# Altium PCB 80361_RevA2-PCB.PcbDoc
Units mm, origin at the board's own origin, x right, y up, seen from the top; angles counter-clockwise.
Board outline 72 x 72 mm, 2 copper layers (Top Layer, Bottom Layer), stack 2.342 mm thick; 1 components, 3 nets, 32 pads, 0 vias.
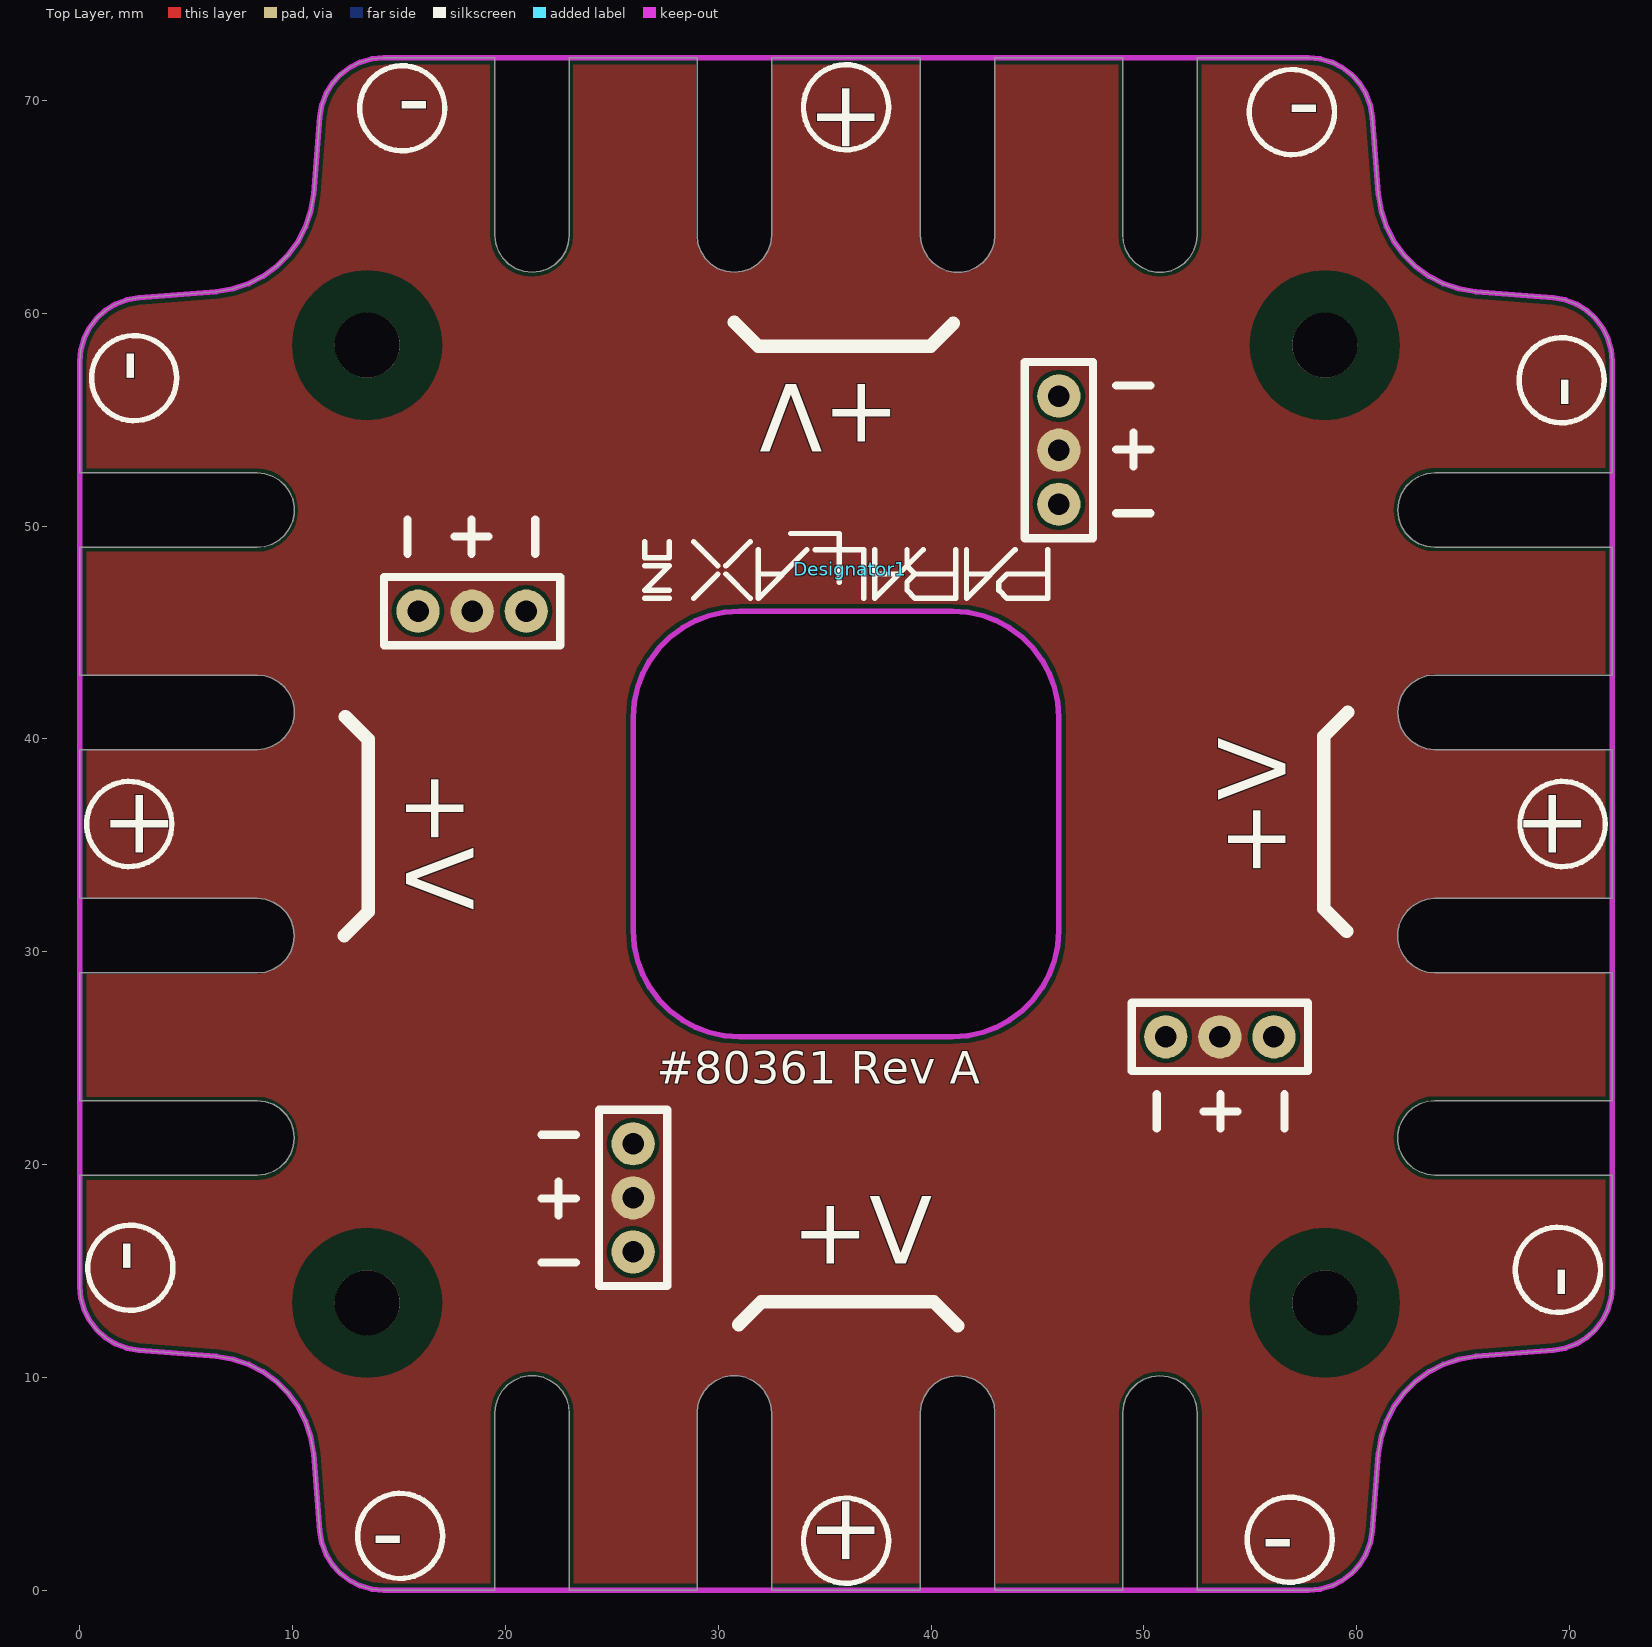
[diagram p0: Top Layer view]
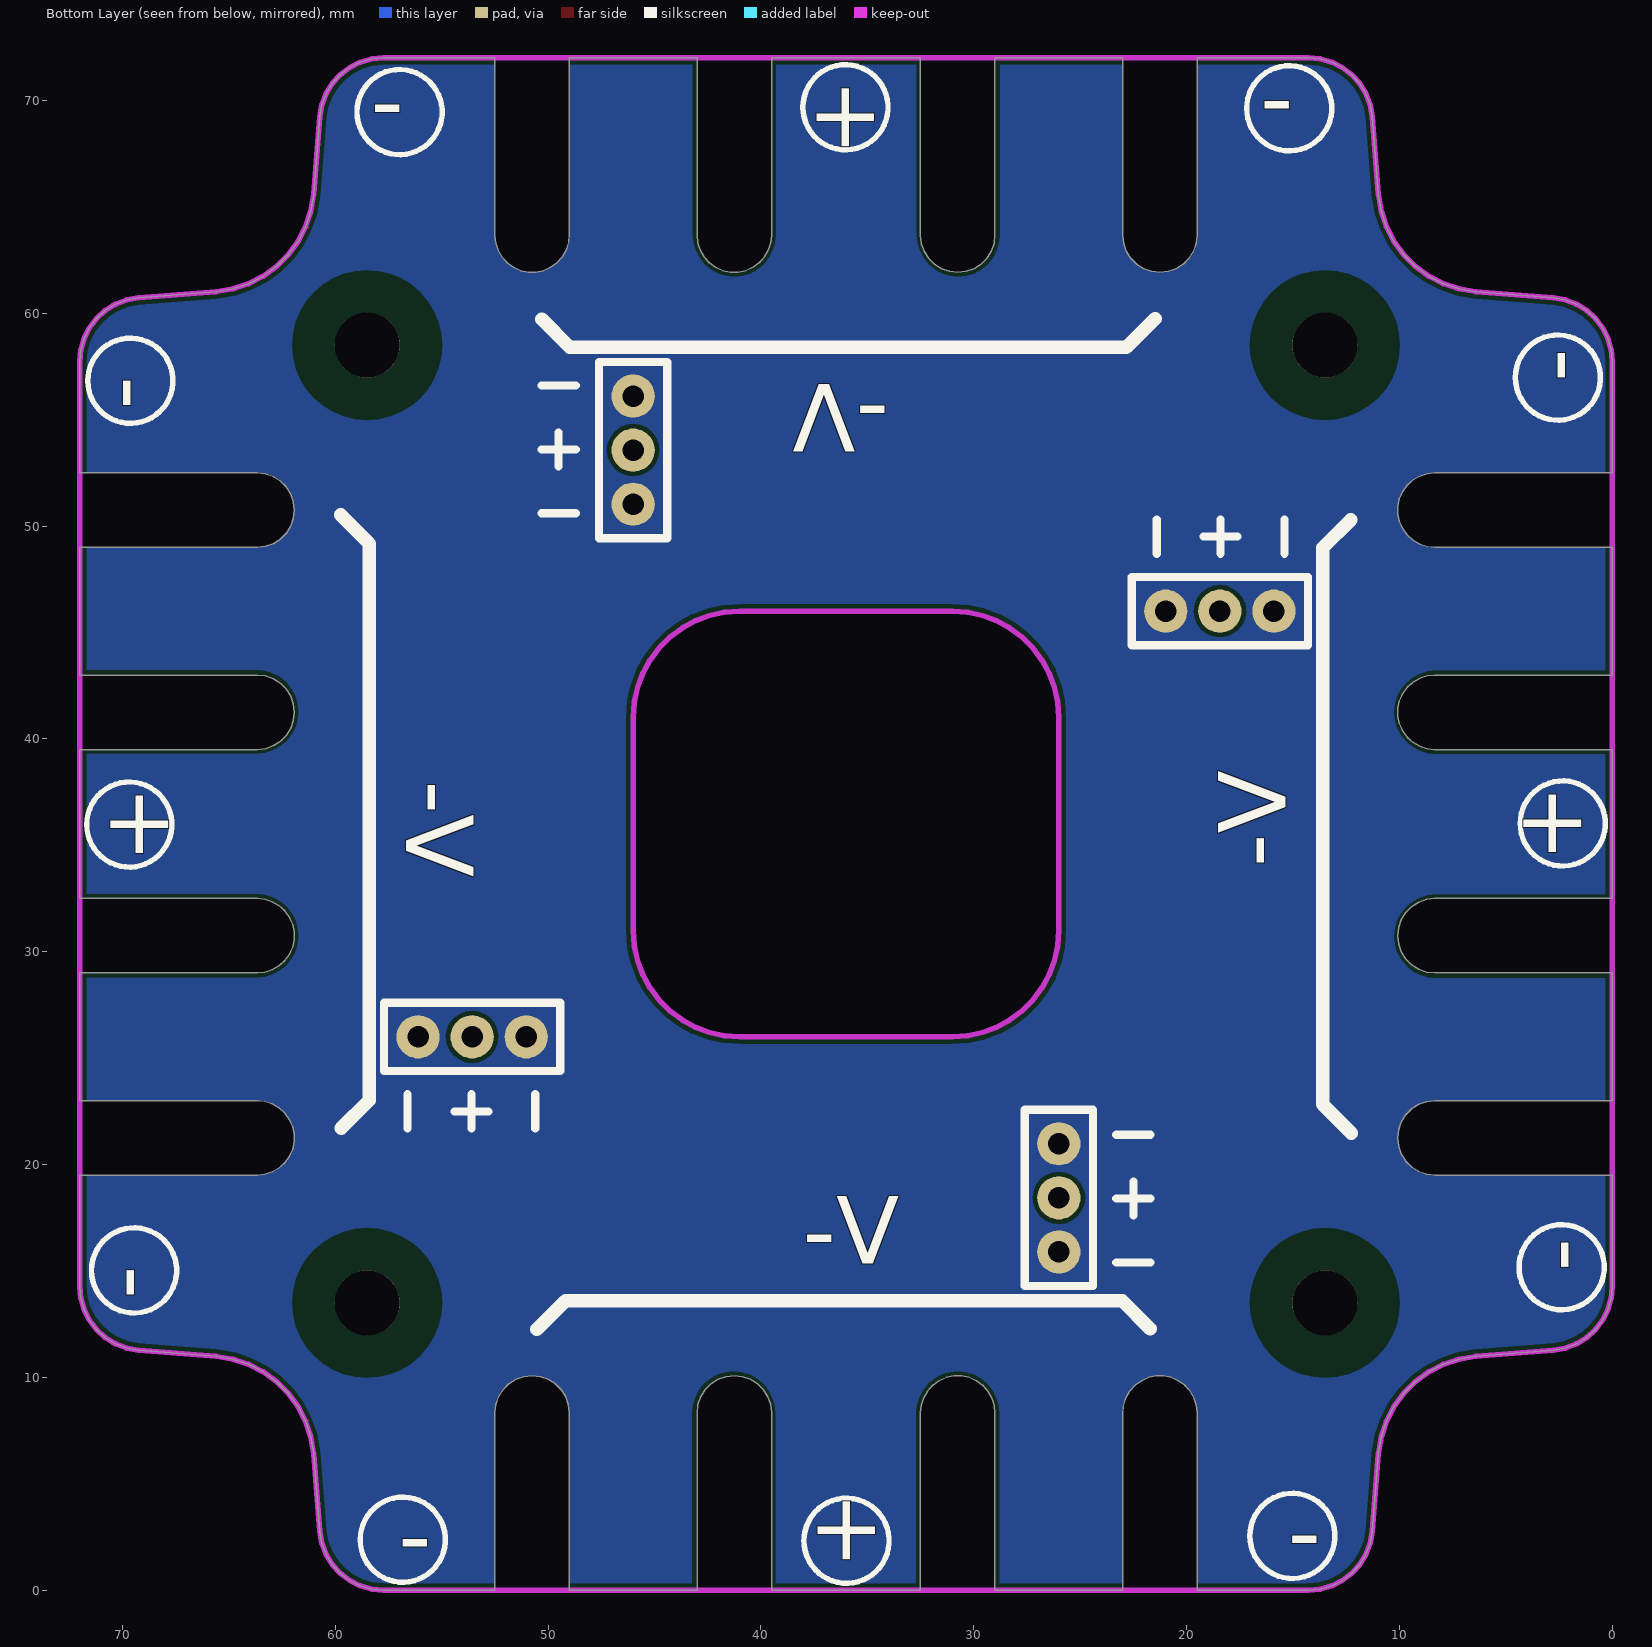
[diagram p1: Bottom Layer view, seen from below]

## Layer stack, top to bottom
Top Solder: solder mask 0.0102, Solder Resist, Dk 3.5
Top Layer: signal copper 0.2845
Dielectric 1: dielectric 1.7729, FR-4, Dk 4.8
Bottom Layer: signal copper 0.2845
Bottom Solder: solder mask 0.0102, Solder Resist, Dk 3.5

## Board outline
401 vertices, not listed, extent 0,0 72,72
cut-out: 26,41 26.051,41.712 26.203,42.409 26.452,43.077 26.794,43.703 27.221,44.274 27.726,44.779 28.297,45.206 28.923,45.548 29.591,45.797 30.288,45.949 31,46 41,46 41.712,45.949 42.409,45.797 43.077,45.548 43.703,45.206 44.274,44.779 44.779,44.274 45.206,43.703 45.548,43.077 45.797,42.409 45.949,41.712 46,41 46,31 45.949,30.288 45.797,29.591 45.548,28.923 45.206,28.297 44.779,27.726 44.274,27.221 43.703,26.794 43.077,26.452 42.409,26.203 41.712,26.051 41,26 31,26 30.288,26.051 29.591,26.203 28.923,26.452 28.297,26.794 27.726,27.221 27.221,27.726 26.794,28.297 26.452,28.923 26.203,29.591 26.051,30.288 26,31

## Design rules (kind name [scope] priority, off if disabled: settings)
Clearance [All] p1: gap=0.203
PlaneClearance [All] p1: clearance=0.889
PolygonConnect [All] p1: connectstyle=Direct reliefconductorwidth=0.254 reliefentries=4 polygonreliefangle="90 Angle" airgapwidth=0.254
RoutingVias [All] p1: holewidth=0.305 width=0.635 viastyle="Through Hole" minholewidth=0.305 minwidth=0.508 maxholewidth=12.7 maxwidth=12.7
SolderMaskExpansion [All] p1: expansion=0.102
Width [All] p1: maxlimit=12.7 minlimit=0.178 preferedwidth=0.254 minimp=50.000000 maximp=50.000000 favimp=50.000000
29 further rules are at their usual default settings.

## Components (designator, comment, footprint, x,y, rotation, side; value= is the part's Value field where it differs from the comment)
Designator1 "Comment" "Parallax Logo_Top" 36.2,48 r180 top

## Footprints (in the part's own frame and the unit in brackets; to place one, negate y for a bottom-side part, rotate by r counter-clockwise, add the part's x,y. Pads: shape width x height; smd on the part's side, far side on the other; paste and mask are expansions set on the pad)
"Parallax Logo_Top" [mm]
  silkscreen extent -9.27,-1.65 9.65,1.4

## Free pads (board coordinates)
  round 1.524 hole 3.5 slot 12 at 0 deg: 1(4.05,21.225) 1(4.05,30.725) 1(4.05,41.25) 1(4.05,50.75) 1(67.925,21.25) 1(67.925,30.75) 1(67.925,41.275) 1(67.925,50.775)
  round 3.048 hole 3.048 unplated: 1(13.5,13.5) 1(13.5,58.5) 1(58.5,13.5) 1(58.5,58.5)
  round 2.032 hole 1.016: 1(15.895,46) 1(18.435,46) 1(20.975,46) 1(26,15.895) 1(26,18.435) 1(26,20.975) 1(46,51.025) 1(46,53.565) 1(46,56.105) 1(51.025,26) 1(53.565,26) 1(56.105,26)
  round 1.524 hole 3.5 slot 12 at 90 deg: 1(21.225,67.925) 1(21.25,4.075) 1(30.725,67.925) 1(30.75,4.075) 1(41.25,67.925) 1(41.275,4.075) 1(50.75,67.925) 1(50.775,4.075)

## Nets (pads, with @x,y where several pads share a name; then routed paths per layer and width w, separated by ;. In a path a pad name is that pad's centre, name@x,y a point inside that pad or via, vN(x,y) a via of type N, cw(c..) or ccw(c..) an arc to the next point about the centre after c; other vN are vias at no path point)
GND: pad.1@4.05,21.225 pad.1@4.05,50.75 pad.1@15.895,46 pad.1@20.975,46 pad.1@21.25,4.075 pad.1@21.225,67.925 pad.1@26,15.895 pad.1@26,20.975 pad.1@46,51.025 pad.1@46,56.105 pad.1@50.75,67.925 pad.1@50.775,4.075 pad.1@51.025,26 pad.1@56.105,26 pad.1@67.925,21.25 pad.1@67.925,50.775
NewNet: 
VIN: pad.1@4.05,30.725 pad.1@4.05,41.25 pad.1@18.435,46 pad.1@26,18.435 pad.1@30.75,4.075 pad.1@30.725,67.925 pad.1@41.25,67.925 pad.1@41.275,4.075 pad.1@46,53.565 pad.1@53.565,26 pad.1@67.925,30.75 pad.1@67.925,41.275

## Polygon pours and split planes (outlines as drawn)
VIN on Top Layer "TOP VIN" (solid, pour order 0): 401 vertices, not listed, extent 0,0 72,72
GND on Bottom Layer "Bottom GND" (solid, pour order 1): 401 vertices, not listed, extent 0,0 72,72

## Keep-outs
Keep-Out Layer:
  lines w0.254: 0,14.268 0,57.732 0.052,58.288 0.206,58.824 0.456,59.323 0.795,59.766 1.21,60.14 1.687,60.429 2.209,60.626 2.759,60.722 6.409,61.017 6.436,61.019 7.2,61.146 7.936,61.39 8.625,61.744 9.251,62.201 9.799,62.749 10.256,63.375 10.61,64.064 10.854,64.8 10.981,65.564 10.983,65.59 11.278,69.241 11.374,69.791 11.57,70.313 11.86,70.79 12.234,71.205 12.677,71.544 13.176,71.794 13.712,71.948 14.268,72 57.732,72 58.288,71.948 58.824,71.794 59.323,71.544 59.766,71.205 60.14,70.79 60.429,70.313 60.626,69.791 60.722,69.241 61.017,65.59 61.019,65.564 61.146,64.8 61.39,64.064 61.744,63.375 62.201,62.749 62.749,62.201 63.375,61.744 64.064,61.39 64.8,61.146 65.564,61.019 65.59,61.017 69.241,60.722 69.791,60.626 70.313,60.429 70.79,60.14 71.205,59.766 71.544,59.323 71.794,58.824 71.948,58.288 72,57.732 72,14.268 71.948,13.712 71.794,13.176 71.544,12.677 71.205,12.234 70.79,11.86 70.313,11.57 69.791,11.374 69.241,11.278 65.59,10.983 65.564,10.981 64.8,10.854 64.064,10.61 63.375,10.256 62.749,9.799 62.201,9.251 61.744,8.625 61.39,7.936 61.146,7.2 61.019,6.436 61.017,6.409 60.722,2.759 60.626,2.209 60.429,1.687 60.14,1.21 59.766,0.795 59.323,0.456 58.824,0.206 58.288,0.052 57.732,0 14.268,0 13.712,0.052 13.176,0.206 12.677,0.456 12.234,0.795 11.86,1.21 11.57,1.687 11.374,2.209 11.278,2.759 10.983,6.409 10.981,6.436 10.854,7.2 10.61,7.936 10.256,8.625 9.799,9.251 9.251,9.799 8.625,10.256 7.936,10.61 7.2,10.854 6.436,10.981 6.409,10.983 2.759,11.278 2.209,11.374 1.687,11.57 1.21,11.86 0.795,12.234 0.456,12.677 0.206,13.176 0.052,13.712 0,14.268 ; 26,31 26,41 26.051,41.712 26.203,42.409 26.452,43.077 26.794,43.703 27.221,44.274 27.726,44.779 28.297,45.206 28.923,45.548 29.591,45.797 30.288,45.949 31,46 41,46 41.712,45.949 42.409,45.797 43.077,45.548 43.703,45.206 44.274,44.779 44.779,44.274 45.206,43.703 45.548,43.077 45.797,42.409 45.949,41.712 46,41 46,31 45.949,30.288 45.797,29.591 45.548,28.923 45.206,28.297 44.779,27.726 44.274,27.221 43.703,26.794 43.077,26.452 42.409,26.203 41.712,26.051 41,26 31,26 30.288,26.051 29.591,26.203 28.923,26.452 28.297,26.794 27.726,27.221 27.221,27.726 26.794,28.297 26.452,28.923 26.203,29.591 26.051,30.288 26,31

## Other copper
Multi-Layer:
  pour cut-out: 10.325,13.5 ccw(c13.5,13.5) 13.5,10.325 ccw(c13.5,13.5) 16.675,13.5 ccw(c13.5,13.5) 13.5,16.675 ccw(c13.5,13.5)
  pour cut-out: 55.325,13.5 ccw(c58.5,13.5) 58.5,10.325 ccw(c58.5,13.5) 61.675,13.5 ccw(c58.5,13.5) 58.5,16.675 ccw(c58.5,13.5)
  pour cut-out: 55.325,58.5 ccw(c58.5,58.5) 58.5,55.325 ccw(c58.5,58.5) 61.675,58.5 ccw(c58.5,58.5) 58.5,61.675 ccw(c58.5,58.5)
  pour cut-out: 10.325,58.5 ccw(c13.5,58.5) 13.5,55.325 ccw(c13.5,58.5) 16.675,58.5 ccw(c13.5,58.5) 13.5,61.675 ccw(c13.5,58.5)

## Silkscreen, mask and mechanical layers (free items; w line width, h text height)
Top Overlay:
  circle w0.254: c2.325,36 r2.001
  circle w0.254: c2.375,15.15 r2.001
  circle w0.254: c2.55,56.95 r2.001
  circle w0.254: c36,69.675 r2.001
  circle w0.254: c15.15,69.625 r2.001
  circle w0.254: c56.95,69.45 r2.001
  circle w0.254: c69.675,36 r2.001
  circle w0.254: c69.625,56.85 r2.001
  circle w0.254: c69.45,15.05 r2.001
  circle w0.254: c15.05,2.55 r2.001
  circle w0.254: c56.85,2.375 r2.001
  circle w0.254: c36,2.325 r2.001
  lines w0.381: 15.4,48.7 15.4,50.3 ; 17.6,49.5 19.2,49.5 ; 18.4,48.7 18.4,50.3 ; 21.4,48.7 21.4,50.3 ; 21.7,15.4 23.3,15.4 ; 21.7,18.4 23.3,18.4 ; 21.7,21.4 23.3,21.4 ; 22.5,17.6 22.5,19.2 ; 48.7,50.6 50.3,50.6 ; 48.7,53.6 50.3,53.6 ; 48.7,56.6 50.3,56.6 ; 49.5,52.8 49.5,54.4 ; 50.6,21.7 50.6,23.3 ; 52.8,22.5 54.4,22.5 ; 53.6,21.7 53.6,23.3 ; 56.6,21.7 56.6,23.3 ; 14.3,44.4 14.3,47.6 22.575,47.6 22.575,44.4 14.3,44.4 ; 24.4,14.3 24.4,22.575 27.6,22.575 27.6,14.3 24.4,14.3 ; 44.4,49.425 47.6,49.425 47.6,57.7 44.4,57.7 44.4,49.425 ; 49.425,24.4 49.425,27.6 57.7,27.6 57.7,24.4 49.425,24.4
  lines w0.635: 12.425,30.75 13.5,31.825 ; 12.475,41.05 13.55,39.975 13.55,31.875 ; 30.75,59.575 31.825,58.5 ; 30.95,12.475 32.025,13.55 40.125,13.55 ; 31.875,58.45 39.975,58.45 41.05,59.525 ; 40.175,13.5 41.25,12.425 ; 58.45,40.125 58.45,32.025 59.525,30.95 ; 58.5,40.175 59.575,41.25
  text "+" at 34.65,71.025 h3.17 r270
  text "-" at 16.5,70.975 h3.17 r180
  text "-" at 58.3,70.8 h3.17 r180
  text "-" at 1.2,58.3 h3.17 r270
  text "+V" at 38.55,56.65 h3.17 r180
  text "-" at 70.975,55.5 h3.17 r90
  text "+V" at 15.35,38.55 h3.17 r270
  text "+" at 71.025,37.35 h3.17 r180
  text "+" at 0.975,34.65 h3.17
  text "+V" at 56.65,33.45 h3.17 r90
  text "#80361 Rev A" at 27.1,23.8 h1.52
  text "-" at 1.025,16.5 h3.17 r270
  text "+V" at 33.45,15.35 h3.17
  text "-" at 70.8,13.7 h3.17 r90
  text "-" at 13.7,1.2 h3.17
  text "-" at 55.5,1.025 h3.17
  text "+" at 37.35,0.975 h3.17 r90
Bottom Overlay:
  circle w0.254: c2.55,56.975 r2.001
  circle w0.254: c2.375,15.175 r2.001
  circle w0.254: c2.325,36.025 r2.001
  circle w0.254: c56.975,69.45 r2.001
  circle w0.254: c15.175,69.625 r2.001
  circle w0.254: c36.025,69.675 r2.001
  circle w0.254: c69.45,15.025 r2.001
  circle w0.254: c69.625,56.825 r2.001
  circle w0.254: c69.675,35.975 r2.001
  circle w0.254: c35.975,2.325 r2.001
  circle w0.254: c56.825,2.375 r2.001
  circle w0.254: c15.025,2.55 r2.001
  lines w0.381: 15.4,48.7 15.4,50.3 ; 17.6,49.5 19.2,49.5 ; 18.4,48.7 18.4,50.3 ; 21.4,48.7 21.4,50.3 ; 21.7,15.4 23.3,15.4 ; 21.7,18.4 23.3,18.4 ; 21.7,21.4 23.3,21.4 ; 22.5,17.6 22.5,19.2 ; 48.7,50.6 50.3,50.6 ; 48.7,53.6 50.3,53.6 ; 48.7,56.6 50.3,56.6 ; 49.5,52.8 49.5,54.4 ; 50.6,21.7 50.6,23.3 ; 52.8,22.5 54.4,22.5 ; 53.6,21.7 53.6,23.3 ; 56.6,21.7 56.6,23.3 ; 14.3,44.4 14.3,47.6 22.575,47.6 22.575,44.4 14.3,44.4 ; 24.4,14.3 24.4,22.575 27.6,22.575 27.6,14.3 24.4,14.3 ; 44.4,49.425 47.6,49.425 47.6,57.7 44.4,57.7 44.4,49.425 ; 49.425,24.4 49.425,27.6 57.7,27.6 57.7,24.4 49.425,24.4
  lines w0.635: 12.25,21.475 13.6,22.825 13.6,48.975 12.275,50.3 ; 21.475,59.75 22.825,58.4 48.975,58.4 50.3,59.725 ; 21.7,12.275 23.025,13.6 49.175,13.6 50.525,12.25 ; 59.725,21.7 58.4,23.025 58.4,49.175 59.75,50.525
  text "+" at 34.675,71.025 h3.17 r270
  text "-" at 16.525,70.975 h3.17 r180
  text "-" at 58.325,70.8 h3.17 r180
  text "-" at 1.2,58.325 h3.17 r270
  text "-V" at 33.975,56.65 h3.17 r180
  text "-" at 70.975,55.475 h3.17 r90
  text "-V" at 56.65,38.025 h3.17 r90
  text "+" at 71.025,37.325 h3.17 r180
  text "+" at 0.975,34.675 h3.17
  text "-V" at 15.35,33.975 h3.17 r270
  text "-" at 1.025,16.525 h3.17 r270
  text "-V" at 38.025,15.35 h3.17
  text "-" at 70.8,13.675 h3.17 r90
  text "-" at 13.675,1.2 h3.17
  text "-" at 55.475,1.025 h3.17
  text "+" at 37.325,0.975 h3.17 r90
Top Paste:
  region: 10.028,40.946 cw(c8.305,41.25) 8.305,39.5 -0.025,39.5 -0.025,37.85 11.825,37.85 11.825,40.946
  region: -0.025,44.65 11.825,44.65 11.825,41.554 10.028,41.554 ccw(c8.305,41.25) 8.305,43 -0.025,43
  region: -0.025,34.125 11.825,34.125 11.825,31.029 10.028,31.029 ccw(c8.305,30.725) 8.305,32.475 -0.025,32.475
  region: 10.028,30.421 cw(c8.305,30.725) 8.305,28.975 -0.025,28.975 -0.025,27.325 11.825,27.325 11.825,30.421
  region: 40.946,61.947 cw(c41.25,63.67) 39.5,63.67 39.5,72 37.85,72 37.85,60.15 40.946,60.15
  region: 44.65,72 44.65,60.15 41.554,60.15 41.554,61.947 ccw(c41.25,63.67) 43,63.67 43,72
  region: 34.125,72 34.125,60.15 31.029,60.15 31.029,61.947 ccw(c30.725,63.67) 32.475,63.67 32.475,72
  region: 30.421,61.947 cw(c30.725,63.67) 28.975,63.67 28.975,72 27.325,72 27.325,60.15 30.421,60.15
  region: 61.947,31.054 cw(c63.67,30.75) 63.67,32.5 72,32.5 72,34.15 60.15,34.15 60.15,31.054
  region: 72,27.35 60.15,27.35 60.15,30.446 61.947,30.446 ccw(c63.67,30.75) 63.67,29 72,29
  region: 72,37.875 60.15,37.875 60.15,40.971 61.947,40.971 ccw(c63.67,41.275) 63.67,39.525 72,39.525
  region: 61.947,41.579 cw(c63.67,41.275) 63.67,43.025 72,43.025 72,44.675 60.15,44.675 60.15,41.579
  region: 41.579,10.053 cw(c41.275,8.33) 43.025,8.33 43.025,0 44.675,0 44.675,11.85 41.579,11.85
  region: 37.875,0 37.875,11.85 40.971,11.85 40.971,10.053 ccw(c41.275,8.33) 39.525,8.33 39.525,0
  region: 27.35,0 27.35,11.85 30.446,11.85 30.446,10.053 ccw(c30.75,8.33) 29,8.33 29,0
  region: 31.054,10.053 cw(c30.75,8.33) 32.5,8.33 32.5,0 34.15,0 34.15,11.85 31.054,11.85
Bottom Paste:
  region: 10.028,50.446 cw(c8.305,50.75) 8.305,49 -0.025,49 -0.025,47.35 11.825,47.35 11.825,50.446
  region: -0.025,54.15 11.825,54.15 11.825,51.054 10.028,51.054 ccw(c8.305,50.75) 8.305,52.5 -0.025,52.5
  region: -0.025,24.625 11.825,24.625 11.825,21.529 10.028,21.529 ccw(c8.305,21.225) 8.305,22.975 -0.025,22.975
  region: 10.028,20.921 cw(c8.305,21.225) 8.305,19.475 -0.025,19.475 -0.025,17.825 11.825,17.825 11.825,20.921
  region: 50.446,61.947 cw(c50.75,63.67) 49,63.67 49,72 47.35,72 47.35,60.15 50.446,60.15
  region: 54.15,72 54.15,60.15 51.054,60.15 51.054,61.947 ccw(c50.75,63.67) 52.5,63.67 52.5,72
  region: 24.625,72 24.625,60.15 21.529,60.15 21.529,61.947 ccw(c21.225,63.67) 22.975,63.67 22.975,72
  region: 20.921,61.947 cw(c21.225,63.67) 19.475,63.67 19.475,72 17.825,72 17.825,60.15 20.921,60.15
  region: 61.947,21.554 cw(c63.67,21.25) 63.67,23 72,23 72,24.65 60.15,24.65 60.15,21.554
  region: 72,17.85 60.15,17.85 60.15,20.946 61.947,20.946 ccw(c63.67,21.25) 63.67,19.5 72,19.5
  region: 72,47.375 60.15,47.375 60.15,50.471 61.947,50.471 ccw(c63.67,50.775) 63.67,49.025 72,49.025
  region: 61.947,51.079 cw(c63.67,50.775) 63.67,52.525 72,52.525 72,54.175 60.15,54.175 60.15,51.079
  region: 51.079,10.053 cw(c50.775,8.33) 52.525,8.33 52.525,0 54.175,0 54.175,11.85 51.079,11.85
  region: 47.375,0 47.375,11.85 50.471,11.85 50.471,10.053 ccw(c50.775,8.33) 49.025,8.33 49.025,0
  region: 17.85,0 17.85,11.85 20.946,11.85 20.946,10.053 ccw(c21.25,8.33) 19.5,8.33 19.5,0
  region: 21.554,10.053 cw(c21.25,8.33) 23,8.33 23,0 24.65,0 24.65,11.85 21.554,11.85
Top Solder:
  region: 44.275,72 38.275,72 38.275,60.525 44.275,60.525
  region: 33.75,72 27.75,72 27.75,60.525 33.75,60.525
  region: 0,44.275 0,38.275 11.475,38.275 11.475,44.275
  region: 72,27.725 72,33.725 60.525,33.725 60.525,27.725
  region: 72,38.25 72,44.25 60.525,44.25 60.525,38.25
  rectangle: 38.25,0 44.25,11.475
  rectangle: 27.725,0 33.725,11.475
  region: 0,33.75 0,27.75 11.475,27.75 11.475,33.75
Bottom Solder:
  rectangle: 18.225,0 24.225,11.475
  rectangle: 47.75,0 53.75,11.475
  region: 72,47.75 72,53.75 60.525,53.75 60.525,47.75
  region: 72,18.225 72,24.225 60.525,24.225 60.525,18.225
  region: 0,53.775 0,47.775 11.475,47.775 11.475,53.775
  region: 0,24.25 0,18.25 11.475,18.25 11.475,24.25
  region: 24.25,72 18.25,72 18.25,60.525 24.25,60.525
  region: 53.775,72 47.775,72 47.775,60.525 53.775,60.525
Mechanical 3:
  drawing of 195 lines, arcs and shapes, not listed
  text "Board Dimensions and Layer Stack" at 94.15,32.725 h3.05
  text "Layer" at 111.263,21.667 h1.52
  text "Name" at 121.675,21.667 h1.52
  text "Material" at 145.291,21.667 h1.52
  text "Thickness" at 167.129,21.667 h1.52
  text "Constant" at 183.634,21.667 h1.52
  text "Board Layer Stack" at 198.109,21.667 h1.52
  text "1" at 111.263,18.619 h1.52
  text "Top Overlay" at 121.675,18.619 h1.52
  text "2" at 111.263,15.571 h1.52
  text "Top Solder" at 121.675,15.571 h1.52
  text "Solder Resist" at 145.291,15.571 h1.52
  text "0.010mm" at 167.129,15.571 h1.52
  text "3.5" at 183.634,15.571 h1.52
  text "3" at 111.263,12.523 h1.52
  text "Top Layer" at 121.675,12.523 h1.52
  text "Copper" at 145.291,12.523 h1.52
  text "0.284mm" at 167.129,12.523 h1.52
  text "4" at 111.263,9.475 h1.52
  text "Dielectric 1" at 121.675,9.475 h1.52
  text "FR-4" at 145.291,9.475 h1.52
  text "1.773mm" at 167.129,9.475 h1.52
  text "4.8" at 183.634,9.475 h1.52
  text "Plated slot cut-out" at 77.475,8.425 h1.52
  text "5" at 111.263,6.427 h1.52
  text "Bottom Layer" at 121.675,6.427 h1.52
  text "Copper" at 145.291,6.427 h1.52
  text "0.284mm" at 167.129,6.427 h1.52
  text "16x positions" at 77.475,5.65 h1.52
  text "6" at 111.263,3.379 h1.52
  text "Bottom Solder" at 121.675,3.379 h1.52
  text "Solder Resist" at 145.291,3.379 h1.52
  text "0.010mm" at 167.129,3.379 h1.52
  text "3.5" at 183.634,3.379 h1.52
  text "7" at 111.263,0.331 h1.52
  text "Bottom Overlay" at 121.675,0.331 h1.52
Mechanical 4:
  text "YYWW" at 38,21.1 h1.52
Mechanical 5:
  circle w0.254: c13.5,58.5 r3.185
  circle w0.254: c58.5,58.5 r3.185
  circle w0.254: c58.5,13.5 r3.185
  circle w0.254: c13.5,13.5 r3.185
  lines w0.254: 0,14.268 0,19.5 ; 0,23 0,29 ; 0,32.5 0,39.5 ; 0,43 0,49 ; 0,52.5 0,57.732 ; 14.268,0 19.5,0 ; 14.268,72 19.5,72 ; 23,72 29,72 ; 24.2,11.475 21.554,11.475 21.554,10.053 cw(c21.25,8.33) 23,8.33 23,0 ; 24.225,11.475 24.225,0 23,0 ; 29,0 23,0 ; 32.5,0 39.5,0 ; 32.5,72 39.5,72 ; 43,0 49,0 ; 43,72 49,72 ; 52.5,0 57.732,0 ; 52.5,72 57.732,72 ; 72,14.268 72,19.5 ; 72,23 72,29 ; 72,32.5 72,39.5 ; 72,43 72,49 ; 72,52.5 72,57.732 ; 19.5,0 19.5,8.33 cw(c21.25,8.33) 20.946,10.053 20.946,11.475 18.225,11.475 18.225,0 19.5,0
  lines w0.508: 0,14.268 72,57.732 ; 0,57.732 72,14.268 ; 36,34.2 36,36 37.5,36

## Dimensions
27.35,11.85 to 30.446,11.85 on Mechanical 7
27.35,11.85 to 27.35,0 on Mechanical 7
14.268,72 to 14.268,0 on Mechanical 3
13.5,58.5 to 13.5,13.5 on Mechanical 3
4.075,50.75 to 4.075,41.25 on Mechanical 3
4.075,41.25 to 4.075,30.725 on Mechanical 3
4.075,30.725 to 4.075,21.225 on Mechanical 3
41.275,4.075 to 50.775,4.075 on Mechanical 3
30.75,4.075 to 41.275,4.075 on Mechanical 3
21.25,4.075 to 30.75,4.075 on Mechanical 3
13.5,13.5 to 58.5,13.5 on Mechanical 3
0,14.268 to 72,14.268 on Mechanical 3
72,19.5 to 72,23 on Mechanical 3